# Altium PCB THUSBC.PcbDoc
Units mm, origin at the board's own origin, x right, y up, seen from the top; angles counter-clockwise.
Board outline 12.04 x 13.08 mm, 2 copper layers (Top Layer, Bottom Layer); 3 components, 6 nets, 30 pads, 2 vias.
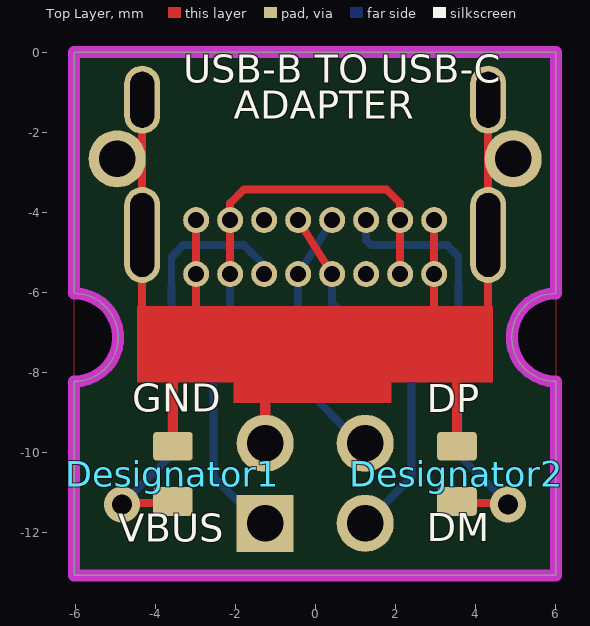
[diagram p0: Top Layer view]
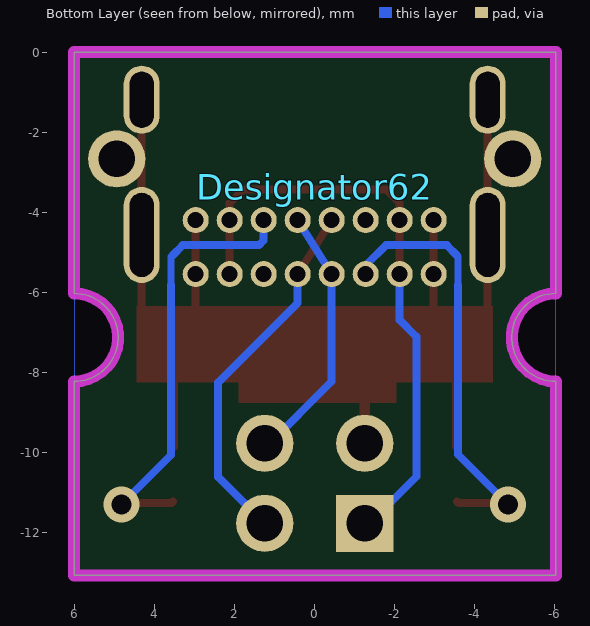
[diagram p1: Bottom Layer view, seen from below]

## Layer stack, top to bottom
Top Solder: solder mask 0.0102, Solder Resist, Dk 3.5
Top Layer: signal copper 0.0356
Dielectric 1: dielectric 0.32, FR-4, Dk 4.8
Bottom Layer: signal copper 0.0356
Bottom Solder: solder mask 0.0102, Solder Resist, Dk 3.5

## Board outline
-6.025,-13.081 -6.025,-8.232 ccw(c-6.025,-7.132) -6.025,-6.032 -6.025,0 6.014,0 6.014,-6.032 ccw(c6.014,-7.132) 6.014,-8.232 6.014,-13.081

## Design rules (kind name [scope] priority, off if disabled: settings)
Clearance [All] p1: gap=0.2 ignorepadtopadclearanceinfootprint=FALSE
PolygonConnect [All] p1: connectstyle=Direct reliefconductorwidth=0.254 reliefentries=4 polygonreliefangle="90 Angle" airgapwidth=0.254
RoutingVias [All] p1: holewidth=0.711 width=1.27 viastyle="Through Hole" minholewidth=0.3 minwidth=0.1 maxholewidth=0.711 maxwidth=1.27
SolderMaskExpansion [All] p1: expansion=0.102 istentingtop=FALSE
Width [All] p1: maxlimit=0.254 minlimit=0.15 preferedwidth=0.2 minimp=50.000000 maximp=50.000000 favimp=50.000000
30 further rules are at their usual default settings.

## Components (designator, comment, footprint, x,y, rotation, side; value= is the part's Value field where it differs from the comment)
Designator1 "Comment" RESC0603 -3.556,-10.541 r90 top
Designator2 "Comment" RESC0603 3.545,-10.541 r90 top
Designator62 "Comment" CONN-GCT-USB4085 0,-1.524 r0 bottom

## Footprints (in the part's own frame and the unit in brackets; to place one, negate y for a bottom-side part, rotate by r counter-clockwise, add the part's x,y. Pads: shape width x height; smd on the part's side, far side on the other; paste and mask are expansions set on the pad)
CONN-GCT-USB4085 [mm]
  rrect100% 0.9x2.4 hole 2.1 slot 0.6 at 0 deg paste-2539.97 mask+0.05: 1(-4.325,3.045) 2(4.325,3.045)
  rrect100% 0.9x1.7 hole 1.4 slot 0.6 at 0 deg paste-2539.97 mask+0.05: 3(-4.325,-0.335) 4(4.325,-0.335)
  round 0.65 hole 0.4 paste-2539.97 mask+0.05: A1(-2.975,4.025) A4(-2.125,4.025) A5(-1.275,4.025) A6(-0.425,4.025) A7(0.425,4.025) A8(1.275,4.025) A9(2.125,4.025) A12(2.975,4.025) B1(2.975,2.675) B4(2.125,2.675) B5(1.275,2.675) B6(0.425,2.675) B7(-0.425,2.675) B8(-1.275,2.675) B9(-2.125,2.675) B12(-2.975,2.675)
  body extent -4.51,-4.6 4.51,4.57, height 3.46
RESC0603 [mm] "RESISTOR, CHIP 0603 (1608)"
  rrect25% 0.72x0.99 smd paste+0 mask+0.075: 1(-0.69,0) 2(0.69,0)
  body extent -0.8,-0.4 0.8,0.4, height 0.37

## Free pads (board coordinates)
  round 1.428 hole 0.92 mask+0.05: 1(-4.95,-2.667) 1(4.95,-2.667) 2(1.25,-11.779) 3(1.25,-9.779) 4(-1.25,-9.779)
  rect 1.428x1.428 hole 0.92 mask+0.05: 1(-1.25,-11.779)

## Via types
v1: diameter 0.9, hole 0.5, Top Layer to Bottom Layer, tented both sides, 2 vias

## Nets (pads, with @x,y where several pads share a name; then routed paths per layer and width w, separated by ;. In a path a pad name is that pad's centre, name@x,y a point inside that pad or via, vN(x,y) a via of type N, cw(c..) or ccw(c..) an arc to the next point about the centre after c; other vN are vias at no path point)
CC1: Designator1.1 Designator62.A5 | length 10.9
  Top Layer w0.2: v1(-4.826,-11.303) -4.79,-11.267 -3.592,-11.267 Designator1.1
  Bottom Layer w0.175: -3.587,-5.82 -3.587,-5.112 -3.556,-5.08
  Bottom Layer w0.2: v1(-4.826,-11.303) -3.587,-10.064 -3.587,-5.82 ; -3.556,-5.08 -3.302,-4.826 -1.778,-4.826 -1.275,-5.329 Designator62.A5
CC2: Designator2.1 Designator62.B5 | length 11
  Top Layer w0.2: Designator2.1 3.581,-11.267 4.79,-11.267 v1(4.826,-11.303)
  Bottom Layer w0.175: 3.556,-5.08 3.588,-5.112 3.588,-5.82
  Bottom Layer w0.2: Designator62.B5 1.275,-4.704 1.397,-4.826 3.302,-4.826 3.556,-5.08 ; 3.588,-5.82 3.588,-10.065 v1(4.826,-11.303)
DM: Designator62.A7 Designator62.B7 pad.2 | length 9.2
  Top Layer w0.2: Designator62.B7 Designator62.A7
  Bottom Layer w0.2: Designator62.A7 0.425,-6.267 2.413,-8.255 2.413,-10.617 pad.2@1.188,-11.842
DP: Designator62.A6 Designator62.B6 pad.3 | length 6.6
  Bottom Layer w0.2: Designator62.B6 Designator62.A6 -0.425,-8.229 pad.3@1.188,-9.842
GND: Designator1.2 Designator2.2 Designator62.1 Designator62.2 Designator62.3 Designator62.4 Designator62.A1 Designator62.A12 Designator62.B1 Designator62.B12 pad.1@4.95,-2.667 pad.1@-4.95,-2.667 pad.4 | length 23.1
  Top Layer w0.2: -4.325,-6.851 Designator62.3 ; -2.975,-6.404 Designator62.B12 ; 2.975,-6.658 Designator62.B1 ; 4.325,-6.851 Designator62.4
  Top Layer w0.254: Designator1.2 -3.556,-7.112 ; -1.27,-7.62 cw(c-1.27,-7.64) -1.25,-7.64 pad.4 ; Designator2.2 3.545,-7.62 3.556,-7.62
VBUS: Designator62.A4 Designator62.A9 Designator62.B4 Designator62.B9 pad.1@-1.25,-11.779 | length 15.1
  Top Layer w0.2: Designator62.A4 Designator62.B9 -2.125,-3.776 -1.778,-3.429 1.778,-3.429 2.125,-3.776 Designator62.A9
  Bottom Layer w0.2: Designator62.A4 -2.125,-6.697 -2.54,-7.112 -2.54,-10.614 pad.1@-1.312,-11.842
pads on no net: Designator62.A8 Designator62.B8

## Polygon pours and split planes (outlines as drawn)
GND on Top Layer "NONET_L01_P001" (solid, shelved, pour order 1): -6.025,-13.081 -6.025,0 6.014,0 6.014,-13.081
GND on Bottom Layer "NONET_L02_P000" (solid, shelved, pour order 0): -6.025,-13.081 -6.025,0 6.014,0 6.014,-13.081

## Keep-outs
Keep-Out Layer:
  the board outline again, w0.3

## Other copper
Top Layer:
  region net GND: -4.445,-6.35 -4.445,-8.255 -2.032,-8.255 -2.032,-8.763 1.905,-8.763 1.905,-8.255 4.445,-8.255 4.445,-6.35

## Silkscreen, mask and mechanical layers (free items; w line width, h text height)
Top Overlay:
  text "USB-B TO USB-C" at -3.302,-1.007 h1.2
  text "ADAPTER" at -2.032,-1.903 h1.2
  text "GND" at -4.577,-9.233 h1.2
  text "DP" at 2.795,-9.238 h1.2
  text "VBUS" at -4.93,-12.472 h1.2
  text "DM" at 2.795,-12.463 h1.2
Top Solder:
  region: -4.445,-6.477 -4.445,-8.128 -1.905,-8.128 -1.905,-8.636 1.778,-8.636 1.778,-8.128 4.445,-8.128 4.445,-6.477 3.937,-6.477
  lines w0.2: 1.188,-9.842 1.188,-9.842
Top Assembly:
  circle w0.05: c-1.312,-11.842 r0.2
  lines w0.05: 6.014,0 6.014,-6.032 ccw(c6.014,-7.132) 6.014,-8.232 6.014,-13.081 6.011,-13.081 -0.071,-13.081 -6.025,-13.081 -6.025,-8.232 ccw(c-6.025,-7.132) -6.025,-6.032 -6.025,0 6.025,0